# Altium PCB Encoder.PcbDoc
Units mil, origin at the board's own origin, x right, y up, seen from the top; angles counter-clockwise.
Board outline 1199.85 x 1200 mil, 2 copper layers (Top Layer, Bottom Layer); 4 components, 7 nets, 34 pads, 5 vias.
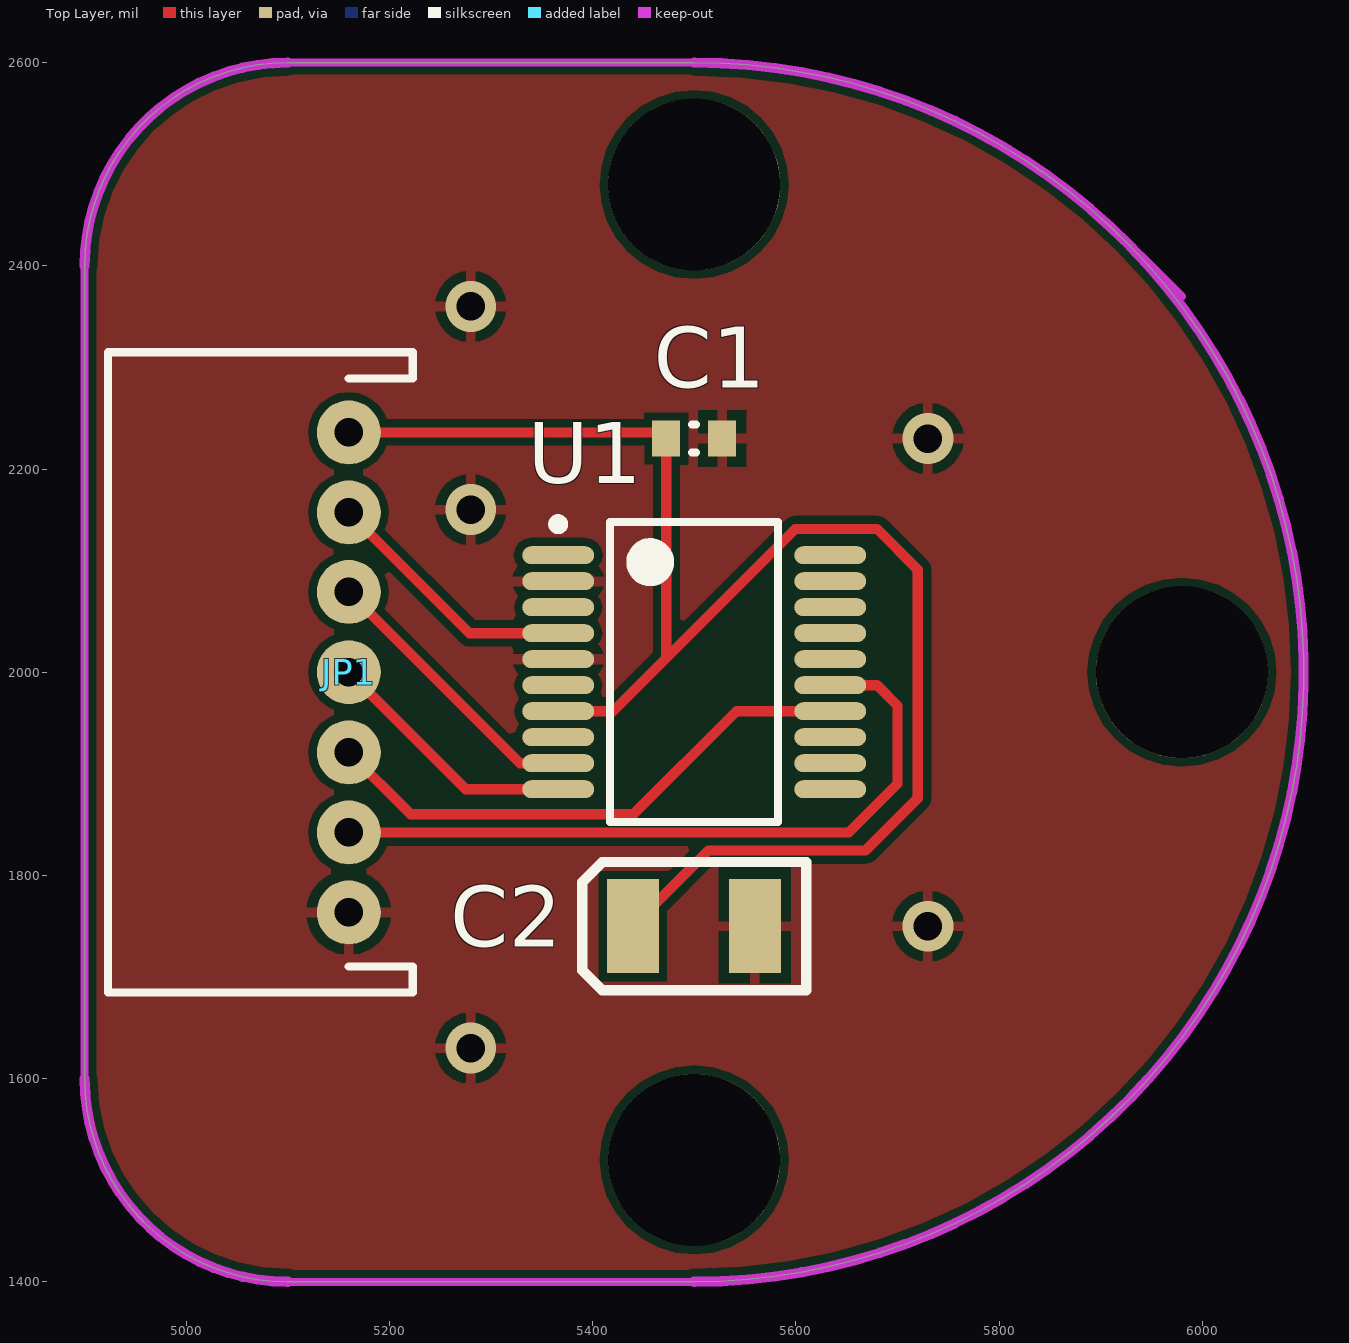
[diagram p0: Top Layer view]
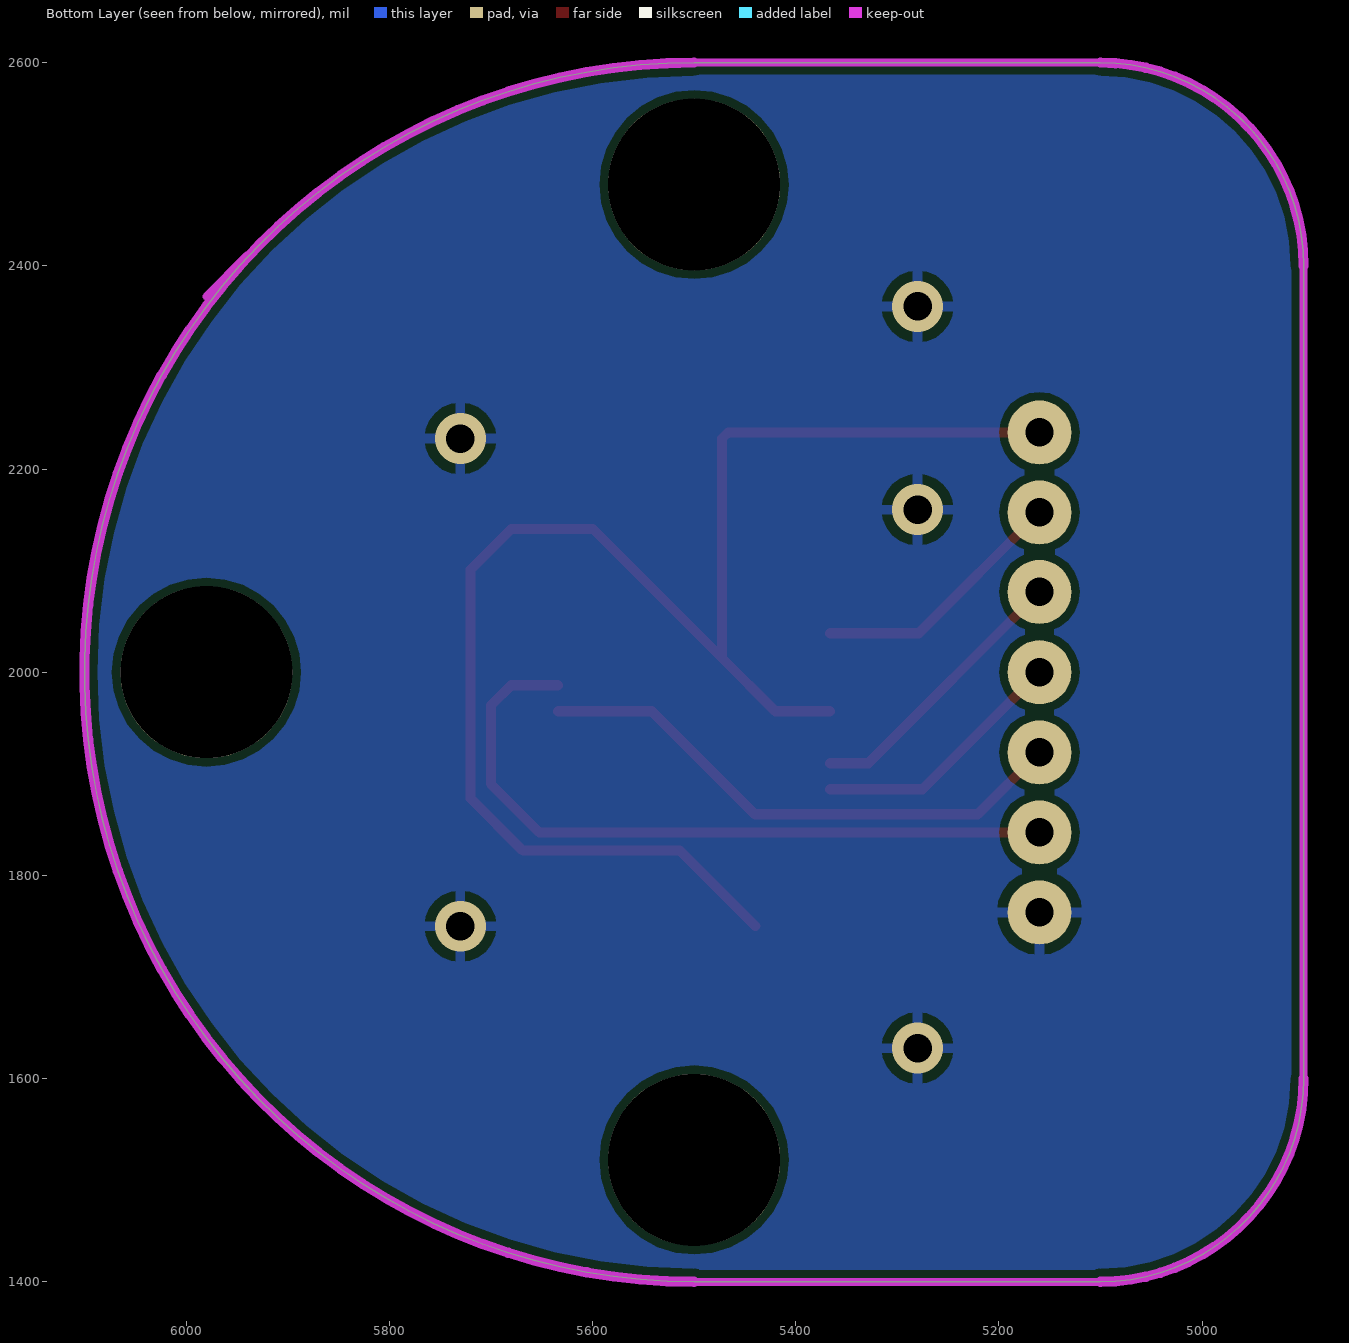
[diagram p1: Bottom Layer view, seen from below]

## Layer stack, top to bottom
Top Solder: solder mask 0.4, Solder Resist, Dk 3.5
Top Layer: signal copper 1.4
Dielectric 1: dielectric 12.6, FR-4, Dk 4.8
Bottom Layer: signal copper 1.4
Bottom Solder: solder mask 0.4, Solder Resist, Dk 3.5

## Board outline
4900,1600 ccw(c5100,1600) 5100,1400 5500,1400 ccw(c5500,2000) 5500,2600 5100,2600 ccw(c5100,2400) 4900,2400

## Design rules (kind name [scope] priority, off if disabled: settings)
Clearance [All] p1: gap=7.87
PolygonConnect [All] p1: connectstyle=Relief reliefconductorwidth=10 reliefentries=4 polygonreliefangle="90 Angle" airgapwidth=10
RoutingVias [All] p1: holewidth=28 width=50 viastyle="Through Hole" minholewidth=28 minwidth=50 maxholewidth=28 maxwidth=50
SolderMaskExpansion [All] p1: expansion=4
Width [All] p1: maxlimit=10 minlimit=10 preferedwidth=10
30 further rules are at their usual default settings.

## Components (designator, comment, footprint, x,y, rotation, side; value= is the part's Value field where it differs from the comment)
C1 "100nF" CAPC0603(1608)100_L 5500,2230 r180 top
C2 "100uF" AVX-CAPC7343_V 5500,1750 r0 top
JP1 "" JST-7-PTH 5160,2000 r90 top
U1 "AS5134" AMS-SSOP-20-7200X5300DE_L 5500,2000 r0 top

## Footprints (in the part's own frame and the unit in brackets; to place one, negate y for a bottom-side part, rotate by r counter-clockwise, add the part's x,y. Pads: shape width x height; smd on the part's side, far side on the other; paste and mask are expansions set on the pad)
AMS-SSOP-20-7200X5300DE_L [mm] "SOP, 20-Leads, Body 7.2x5.3mm, Pitch 0.65mm, IPC High Density"
  oval 1.8x0.45 smd: 1(-3.4,2.925) 2(-3.4,2.275) 3(-3.4,1.625) 4(-3.4,0.975) 5(-3.4,0.325) 6(-3.4,-0.325) 7(-3.4,-0.975) 8(-3.4,-1.625) 9(-3.4,-2.275) 10(-3.4,-2.925) 11(3.4,-2.925) 12(3.4,-2.275) 13(3.4,-1.625) 14(3.4,-0.975) 15(3.4,-0.325) 16(3.4,0.325) 17(3.4,0.975) 18(3.4,1.625) 19(3.4,2.275) 20(3.4,2.925)
  silkscreen extent -3.52,-3.75 2.1,3.82, body extent -2.8,-3.75 2.8,3.75, height 1.99
AVX-CAPC7343_V [mm] "SMT Capacitor, 2 Leads, Body 7.3x4.3mm"
  rect 1.3x2.35 smd: 1(-1.535,0.001) 2(1.515,0.001)
  silkscreen extent -2.8,-1.6 2.8,1.6, body extent -2.1,-1.1 2.1,1.1, height 1.9
CAPC0603(1608)100_L [mm] "Chip Capacitor, Body 1.6x0.8mm, Height 1.0mm, IPC High Density"
  rect 0.7x0.9 smd: 1(-0.7,0) 2(0.7,0)
  silkscreen extent -0.05,-0.35 0.05,0.35, body extent -0.87,-0.47 0.88,0.48, height 1
JST-7-PTH [mil]
  round 63 hole 28: 1(-236.48,0) 2(-157.74,0) 3(-79,0) 4(0,0) 5(79,0) 6(157.22,0) 7(235.96,0)
  silkscreen extent -315,-63 315,237, body extent -353,-10 353,250, height 198

## Part data
C1: library part CMP-1035-02575-1, "CAP 100nF 6.3V ±5% 0603 (1608 Metric) Thickness 1mm SMD"
C2: library part AVX-CAP-P-2
JP1: library part JST_7_RIGHT
U1: library part CMP-0555-00029-2, "360 Step Programmable High Speed Magnetic Rotary Encoder, 5 V, SSOP-20, Pb-Free, Reel"

## Free pads (board coordinates)
  round 169.29 hole 169.29: 2(5500,2480) 3(5980,2000) 4(5500,1520)

## Via types
v1: diameter 50, hole 28, Top Layer to Bottom Layer, 5 vias

## Nets (pads, with @x,y where several pads share a name; then routed paths per layer and width w, separated by ;. In a path a pad name is that pad's centre, name@x,y a point inside that pad or via, vN(x,y) a via of type N, cw(c..) or ccw(c..) an arc to the next point about the centre after c; other vN are vias at no path point)
A: JP1.3 U1.14 | length 541.1
  Top Layer w10: JP1.3 5220.87,1860.13 5440.13,1860.13 5541.61,1961.61 U1.14
B: JP1.2 U1.15 | length 711.4
  Top Layer w10: JP1.2 5652.26,1842.26 5700,1890 5700,1967.2 5680,1987.2 U1.15
CLK: JP1.5 U1.9 | length 276
  Top Layer w10: JP1.5 5328.57,1910.43 U1.9
CS: JP1.6 U1.4 | length 255.4
  Top Layer w10: JP1.6 5278.83,2038.39 U1.4
DIO: JP1.4 U1.10 | length 253.8
  Top Layer w10: JP1.4 5275.16,1884.84 U1.10
GND: C1.1 C2.2 JP1.1 U1.2 U1.5
  other v1: 5280,1630 5730,1750 5280,2160 5730,2230 5280,2360
VCC: C1.2 C2.1 JP1.7 U1.7 | length 1533.2
  Top Layer w10: JP1.7 5466.48,2235.96 C1.2 5472.44,2014.05 ; U1.7 5420,1961.61 5472.44,2014.05 ; C2.1 5513.91,1824.39 5668.46,1824.39 5720,1875.93 5720,2101 5680,2141 5599.39,2141 5472.44,2014.05
pads on no net: U1.1 U1.3 U1.6 U1.8 U1.11 U1.12 U1.13 U1.16 U1.17 U1.18 U1.19 U1.20

## Polygon pours and split planes (outlines as drawn)
GND on Bottom Layer "GND_L02_P000" (solid, remove dead copper, pour order 0): 4900,2600 6100,2600 6100,1400 4900,1400
GND on Top Layer "GND_L01_P002" (solid, remove dead copper, pour order 2): 4899.43,2596.75 6099.43,2596.75 6099.43,1396.75 4899.43,1396.75

## Keep-outs
Keep-Out Layer:
  lines w7.87: 4900,1600 4900,2400 ; 5100,1400 5500,1400 ; 5100,2600 5500,2600 ; 5940,2410 5980,2370
  lines w10: 4900,1600 ccw(c5100,1600) 5100,1400 ; 4900,2400 cw(c5100,2400) 5100,2600 ; 5500,1400 ccw(c5500,2000) 5500,2600